# Altium PCB CardEdge1_Mother.PcbDoc
Units mm, origin at the board's own origin, x right, y up, seen from the top; angles counter-clockwise.
Board outline 149.48 x 54.99 mm, 2 copper layers (Top Layer, Bottom Layer); 3 components, 15 nets, 299 pads, 0 vias.
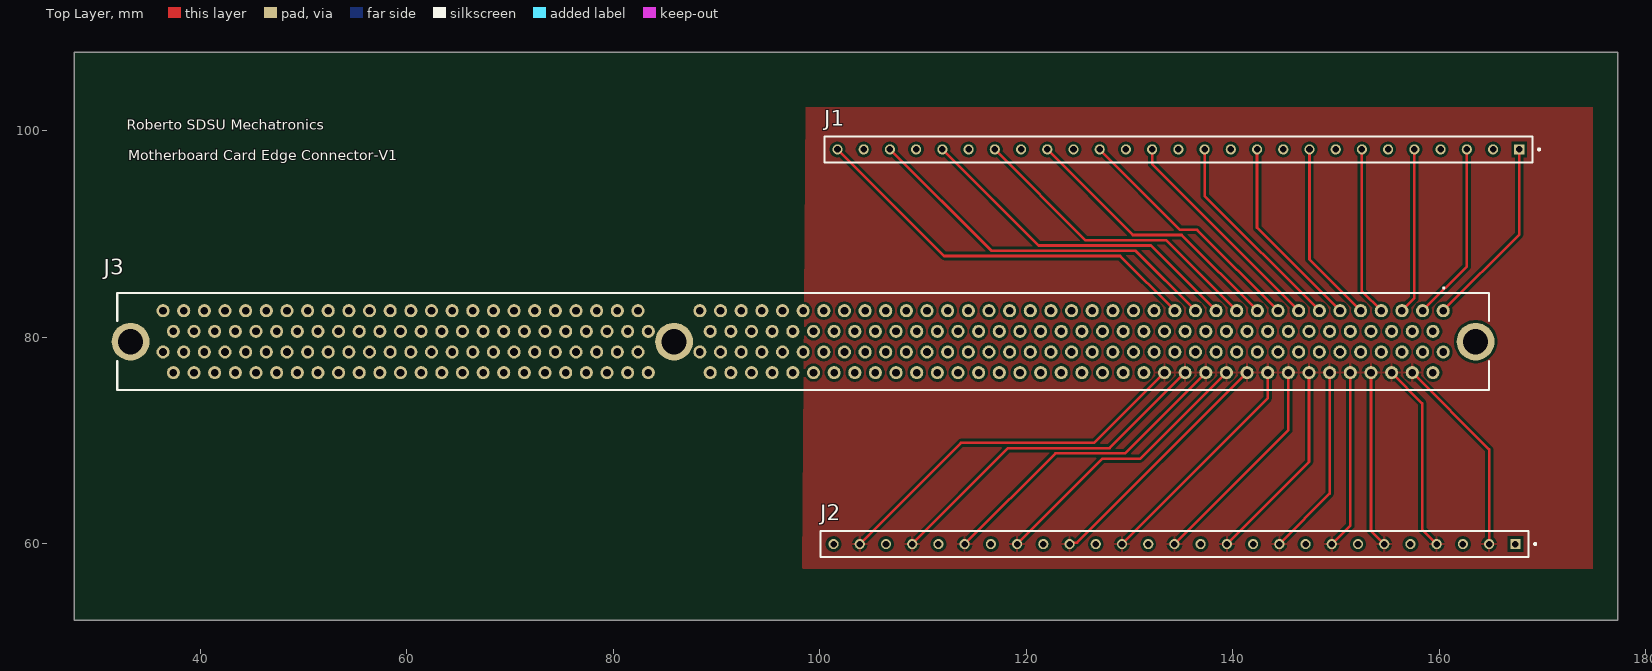
[diagram p0: Top Layer view]
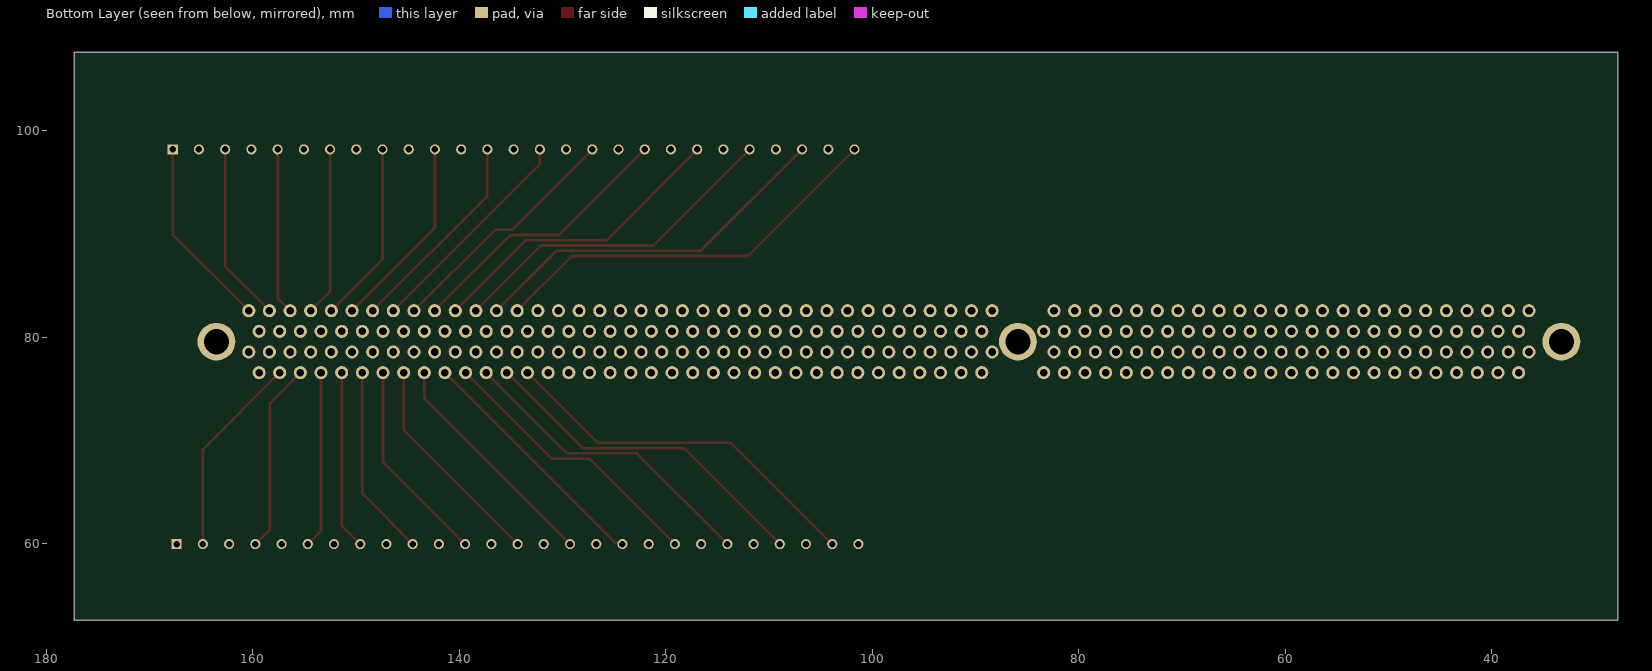
[diagram p1: Bottom Layer view, seen from below]

## Layer stack, top to bottom
Top Solder: solder mask 0.0102, Solder Resist, Dk 3.5
Top Layer: signal copper 0.0356
Dielectric 1: dielectric 0.32, FR-4, Dk 4.8
Bottom Layer: signal copper 0.0356
Bottom Solder: solder mask 0.0102, Solder Resist, Dk 3.5

## Board outline
27.813,52.578 177.292,52.578 177.292,107.569 27.813,107.569

## Design rules (kind name [scope] priority, off if disabled: settings)
Clearance [All] p1: gap=0.254 ignorepadtopadclearanceinfootprint=FALSE except(0: Arc-Hole Track-Hole SMDPad-Hole THPad-Hole Via-Hole Fill-Hole Poly-Hole Region-Hole Text-Hole)
MinimumSolderMaskSliver [All] p1: minsoldermaskwidth=0.2
PolygonConnect [All] p1: connectstyle=Relief reliefconductorwidth=0.254 reliefentries=4 polygonreliefangle="90 Angle" airgapwidth=0.254
RoomDefinition CardEdge1_Mother [InComponentClass('CardEdge1_Mother')] p1: confinementstyle=ConfineIn formatcopy=TRUE lockcomponents=FALSE outline 176.403,56.007 176.403,104.236 29.21,104.236 29.21,56.007
RoutingVias [All] p1: holewidth=0.711 width=1.27 viastyle="Through Hole" minholewidth=0.711 minwidth=1.27 maxholewidth=0.711 maxwidth=1.27
SolderMaskExpansion [All] p1: expansion=0.102 istentingtop=FALSE
Width [All] p1: maxlimit=0.254 minlimit=0.254 preferedwidth=0.254
29 further rules are at their usual default settings.

## Components (designator, comment, footprint, x,y, rotation, side; value= is the part's Value field where it differs from the comment)
J1 "TS-127-G-AA" SAMTEC_TS-127-G-AA 134.747,98.171 r180 top
J2 "TS-127-G-AA" SAMTEC_TS-127-G-AA 134.366,59.944 r180 top
J3 "5145251-2" 51452512 160.401,82.55 r180 top

## Footprints (in the part's own frame and the unit in brackets; to place one, negate y for a bottom-side part, rotate by r counter-clockwise, add the part's x,y. Pads: shape width x height; smd on the part's side, far side on the other; paste and mask are expansions set on the pad)
51452512 [mm]
  round 1.269 hole 0.74: 1(0,0) 2(1,2) 3(2,0) 4(3,2) 5(4,0) 6(5,2) 7(6,0) 8(7,2) 9(8,0) 10(9,2) 11(10,0) 12(11,2) 13(12,0) 14(13,2) 15(14,0) 16(15,2) 17(16,0) 18(17,2) 19(18,0) 20(19,2) 21(20,0) 22(21,2) 23(22,0) 24(23,2) 25(24,0) 26(25,2) 27(26,0) 28(27,2) 29(28,0) 30(29,2) 31(30,0) 32(31,2) 33(32,0) 34(33,2) 35(34,0) 36(35,2) 37(36,0) 38(37,2) 39(38,0) 40(39,2) 41(40,0) 42(41,2) 43(42,0) 44(43,2) 45(44,0) 46(45,2) 47(46,0) 48(47,2) 49(48,0) 50(49,2) 51(50,0) 52(51,2) 53(52,0) 54(53,2) 55(54,0) 56(55,2) 57(56,0) 58(57,2) 59(58,0) 60(59,2) 61(60,0) 62(61,2) 63(62,0) 64(63,2) 65(64,0) 66(65,2) 67(66,0) 68(67,2) 69(68,0) 70(69,2) 71(70,0) 72(71,2) 73(72,0) 75(78,0) 76(79,2) 77(80,0) 78(81,2) 79(82,0) 80(83,2) 81(84,0) 82(85,2) 83(86,0) 84(87,2) 85(88,0) 86(89,2) 87(90,0) 88(91,2) 89(92,0) 90(93,2) 91(94,0) 92(95,2) 93(96,0) 94(97,2) 95(98,0) 96(99,2) 97(100,0) 98(101,2) 99(102,0) 100(103,2) 101(104,0) 102(105,2) 103(106,0) 104(107,2) 105(108,0) 106(109,2) 107(110,0) 108(111,2) 109(112,0) 110(113,2) 111(114,0) 112(115,2) 113(116,0) 114(117,2) 115(118,0) 116(119,2) 117(120,0) 118(121,2) 119(122,0) 120(123,2) 121(124,0) 122(0,4) 123(1,6) 124(2,4) 125(3,6) 126(4,4) 127(5,6) 128(6,4) 129(7,6) 130(8,4) 131(9,6) 132(10,4) 133(11,6) 134(12,4) 135(13,6) 136(14,4) 137(15,6) 138(16,4) 139(17,6) 140(18,4) 141(19,6) 142(20,4) 143(21,6) 144(22,4) 145(23,6) 146(24,4) 147(25,6) 148(26,4) 149(27,6) 150(28,4) 151(29,6) 152(30,4) 153(31,6) 154(32,4) 155(33,6) 156(34,4) 157(35,6) 158(36,4) 159(37,6) 160(38,4) 161(39,6) 162(40,4) 163(41,6) 164(42,4) 165(43,6) 166(44,4) 167(45,6) 168(46,4) 169(47,6) 170(48,4) 171(49,6) 172(50,4) 173(51,6) 174(52,4) 175(53,6) 176(54,4) 177(55,6) 178(56,4) 179(57,6) 180(58,4) 181(59,6) 182(60,4) 183(61,6) 184(62,4) 185(63,6) 186(64,4) 187(65,6) 188(66,4) 189(67,6) 190(68,4) 191(69,6) 192(70,4) 193(71,6) 195(77,6) 196(78,4) 197(79,6) 198(80,4) 199(81,6) 200(82,4) 201(83,6) 202(84,4) 203(85,6) 204(86,4) 205(87,6) 206(88,4) 207(89,6) 208(90,4) 209(91,6) 210(92,4) 211(93,6) 212(94,4) 213(95,6) 214(96,4) 215(97,6) 216(98,4) 217(99,6) 218(100,4) 219(101,6) 220(102,4) 221(103,6) 222(104,4) 223(105,6) 224(106,4) 225(107,6) 226(108,4) 227(109,6) 228(110,4) 229(111,6) 230(112,4) 231(113,6) 232(114,4) 233(115,6) 234(116,4) 235(117,6) 236(118,4) 237(119,6) 238(120,4) 239(121,6) 240(122,4) 241(123,6) 242(124,4)
  round 1.269 hole 0.74 mask+0: 74(77,2) 194(72,4)
  round 3.66 hole 2.44: MH1(-3.14,3) MH3(127.14,3)
  round 3.66 hole 2.44 mask+0: MH2(74.5,3)
  silkscreen extent -4.44,-2.25 128.44,7.7
SAMTEC_TS-127-G-AA [mm]
  rect 0.985x0.985 hole 0.635: 01(-33.02,0)
  round 0.985 hole 0.635: 02(-30.48,0) 03(-27.94,0) 04(-25.4,0) 05(-22.86,0) 06(-20.32,0) 07(-17.78,0) 08(-15.24,0) 09(-12.7,0) 10(-10.16,0) 11(-7.62,0) 12(-5.08,0) 13(-2.54,0) 14(0,0) 15(2.54,0) 16(5.08,0) 17(7.62,0) 18(10.16,0) 19(12.7,0) 20(15.24,0) 21(17.78,0) 22(20.32,0) 23(22.86,0) 24(25.4,0) 25(27.94,0) 26(30.48,0) 27(33.02,0)
  silkscreen extent -35.04,-1.27 34.29,1.27

## Part data
J1 J2: library part CMP-029-000000-1, "Connector Header position", Package=None, Availability="In Stock", Check_prices=https://www.snapeda.com/parts/TS-127-G-AA/Samtec/view-part/?ref=eda, Component Type=Standard, Design Item ID=TS-127-G-AA, MF=Samtec, MP=TS-127-G-AA, Pin Count=27, Price=None, Purchase-URL=https://pricing.snapeda.com/search/part/TS-127-G-AA/?ref=eda, SnapEDA_Link=https://www.snapeda.com/parts/TS-127-G-AA/Samtec/view-part/?ref=snap, Source=TS-127-G-AA.SchLib
J3: "AMP 1MM STD EDGE 242 POS", Manufacturer_Name="TE Connectivity", Datasheet Link=https://www.te.com/commerce/DocumentDelivery/DDEController?Action=srchrtrv&DocNm=5145251&DocType=Customer+Drawing&DocLang=English, Geometry.Height=15.7mm, Manufacturer_Part_Number=5145251-2

## Nets (pads, with @x,y where several pads share a name; then routed paths per layer and width w, separated by ;. In a path a pad name is that pad's centre, name@x,y a point inside that pad or via, vN(x,y) a via of type N, cw(c..) or ccw(c..) an arc to the next point about the centre after c; other vN are vias at no path point)
GND: J2.02 J2.04 J2.06 J2.08 J2.10 J2.12 J2.14 J2.16 J2.18 J2.20 J2.22 J2.24 J2.26 J3.125 J3.127 J3.129 J3.131 J3.133 J3.135 J3.137 J3.139 J3.141 J3.143 J3.145 J3.147 J3.149 | length 305.9
  Top Layer w0.254: J2.26 113.686,69.744 126.595,69.744 J3.149 ; J2.24 118.258,69.236 128.087,69.236 J3.147 ; J2.22 122.83,68.728 129.579,68.728 J3.145 ; J2.20 127.402,68.22 131.071,68.22 J3.143 ; J2.18 124.346,60.084 124.935,60.084 J3.141 ; J2.16 143.401,74.059 J3.139 ; J2.14 145.401,70.979 J3.137 ; J2.12 147.401,67.899 J3.135 ; J2.10 149.401,64.819 J3.133 ; J2.08 151.401,61.739 J3.131 ; J3.129 153.401,61.229 J2.06 ; J3.127 158.369,73.582 158.369,61.341 J2.04 ; J3.125 164.846,69.105 J2.02
NetJ1_01: J1.01 J3.1 | length 18.7
  Top Layer w0.254: J3.1 167.767,89.916 J1.01
NetJ1_03: J1.03 J3.3 | length 17.4
  Top Layer w0.254: J3.3 162.687,86.836 J1.03
NetJ1_05: J1.05 J3.5 | length 16.1
  Top Layer w0.254: J3.5 157.607,83.756 J1.05
NetJ1_07: J1.07 J3.7 | length 16.4
  Top Layer w0.254: J1.07 152.527,84.424 J3.7
NetJ1_09: J1.09 J3.9 | length 18
  Top Layer w0.254: J1.09 147.447,87.504 J3.9 152.527,82.424 J3.9@152.527,82.296
NetJ1_11: J1.11 J3.11 | length 18.9
  Top Layer w0.254: J1.11 142.367,90.584 J3.11
NetJ1_13: J1.13 J3.13 | length 20.2
  Top Layer w0.254: J1.13 137.287,93.664 J3.13
NetJ1_15: J1.15 J3.15 | length 21.5
  Top Layer w0.254: J1.15 132.207,96.744 J3.15
NetJ1_17: J1.17 J3.17 | length 23.7
  Top Layer w0.254: J1.17 134.91,90.388 136.563,90.388 J3.17
NetJ1_19: J1.19 J3.19 | length 26.8
  Top Layer w0.254: J1.19 130.338,89.88 135.071,89.88 J3.19
NetJ1_21: J1.21 J3.21 | length 29.9
  Top Layer w0.254: J1.21 125.766,89.372 133.579,89.372 J3.21
NetJ1_23: J1.23 J3.23 | length 33
  Top Layer w0.254: J1.23 121.194,88.864 132.087,88.864 J3.23
NetJ1_25: J1.25 J3.25 | length 36.1
  Top Layer w0.254: J1.25 116.622,88.356 130.595,88.356 J3.25
NetJ1_27: J1.27 J3.27 | length 39.1
  Top Layer w0.254: J1.27 112.05,87.848 129.103,87.848 J3.27
pads on no net: J1.02 J1.04 J1.06 J1.08 J1.10 J1.12 J1.14 J1.16 J1.18 J1.20 J1.22 J1.24 J1.26 J2.01 J2.03 J2.05 J2.07 J2.09 J2.11 J2.13 J2.15 J2.17 J2.19 J2.21 J2.23 J2.25 J2.27 J3.2 J3.4 J3.6 J3.8 J3.10 J3.12 J3.14 J3.16 J3.18 J3.20 J3.22 J3.24 J3.26 J3.28 J3.29 J3.30 J3.31 J3.32 J3.33 J3.34 J3.35 J3.36 J3.37 J3.38 J3.39 J3.40 J3.41 J3.42 J3.43 J3.44 J3.45 J3.46 J3.47 J3.48 J3.49 J3.50 J3.51 J3.52 J3.53 J3.54 J3.55 J3.56 J3.57 J3.58 J3.59 J3.60 J3.61 J3.62 J3.63 J3.64 J3.65 J3.66 J3.67 J3.68 J3.69 J3.70 J3.71 J3.72 J3.73 J3.74 J3.75 J3.76 J3.77 J3.78 J3.79 J3.80 J3.81 J3.82 J3.83 J3.84 J3.85 J3.86 J3.87 J3.88 J3.89 J3.90 J3.91 J3.92 J3.93 J3.94 J3.95 J3.96 J3.97 J3.98 J3.99 J3.100 J3.101 J3.102 J3.103 J3.104 J3.105 J3.106 J3.107 J3.108 J3.109 J3.110 J3.111 J3.112 J3.113 J3.114 J3.115 J3.116 J3.117 J3.118 J3.119 J3.120 J3.121 J3.122 J3.123 J3.124 J3.126 J3.128 J3.130 J3.132 J3.134 J3.136 J3.138 J3.140 J3.142 J3.144 J3.146 J3.148 J3.150 J3.151 J3.152 J3.153 J3.154 J3.155 J3.156 J3.157 J3.158 J3.159 J3.160 J3.161 J3.162 J3.163 J3.164 J3.165 J3.166 J3.167 J3.168 J3.169 J3.170 J3.171 J3.172 J3.173 J3.174 J3.175 J3.176 J3.177 J3.178 J3.179 J3.180 J3.181 J3.182 J3.183 J3.184 J3.185 J3.186 J3.187 J3.188 J3.189 J3.190 J3.191 J3.192 J3.193 J3.194 J3.195 J3.196 J3.197 J3.198 J3.199 J3.200 J3.201 J3.202 J3.203 J3.204 J3.205 J3.206 J3.207 J3.208 J3.209 J3.210 J3.211 J3.212 J3.213 J3.214 J3.215 J3.216 J3.217 J3.218 J3.219 J3.220 J3.221 J3.222 J3.223 J3.224 J3.225 J3.226 J3.227 J3.228 J3.229 J3.230 J3.231 J3.232 J3.233 J3.234 J3.235 J3.236 J3.237 J3.238 J3.239 J3.240 J3.241 J3.242 J3.MH1 J3.MH2 J3.MH3

## Polygon pours and split planes (outlines as drawn)
GND on Top Layer "GND_L01_P001" (solid, pour order 1): 98.65,102.235 174.881,102.235 174.881,57.531 98.317,57.531

## Silkscreen, mask and mechanical layers (free items; w line width, h text height)
Top Overlay:
  text "Roberto SDSU Mechatronics" at 32.893,100.076 h1
  text "Motherboard Card Edge Connector-V1" at 33.02,97.107 h1
Mechanical 1:
  lines w0.1: 27.813,52.578 27.813,107.569 177.292,107.569 177.292,52.578 27.813,52.578
  lines w0.254: 27.813,52.578 27.813,107.569 177.292,107.569 177.292,52.578 27.813,52.578